# EAGLE board controlBoard (EAGLE 9.2.0)
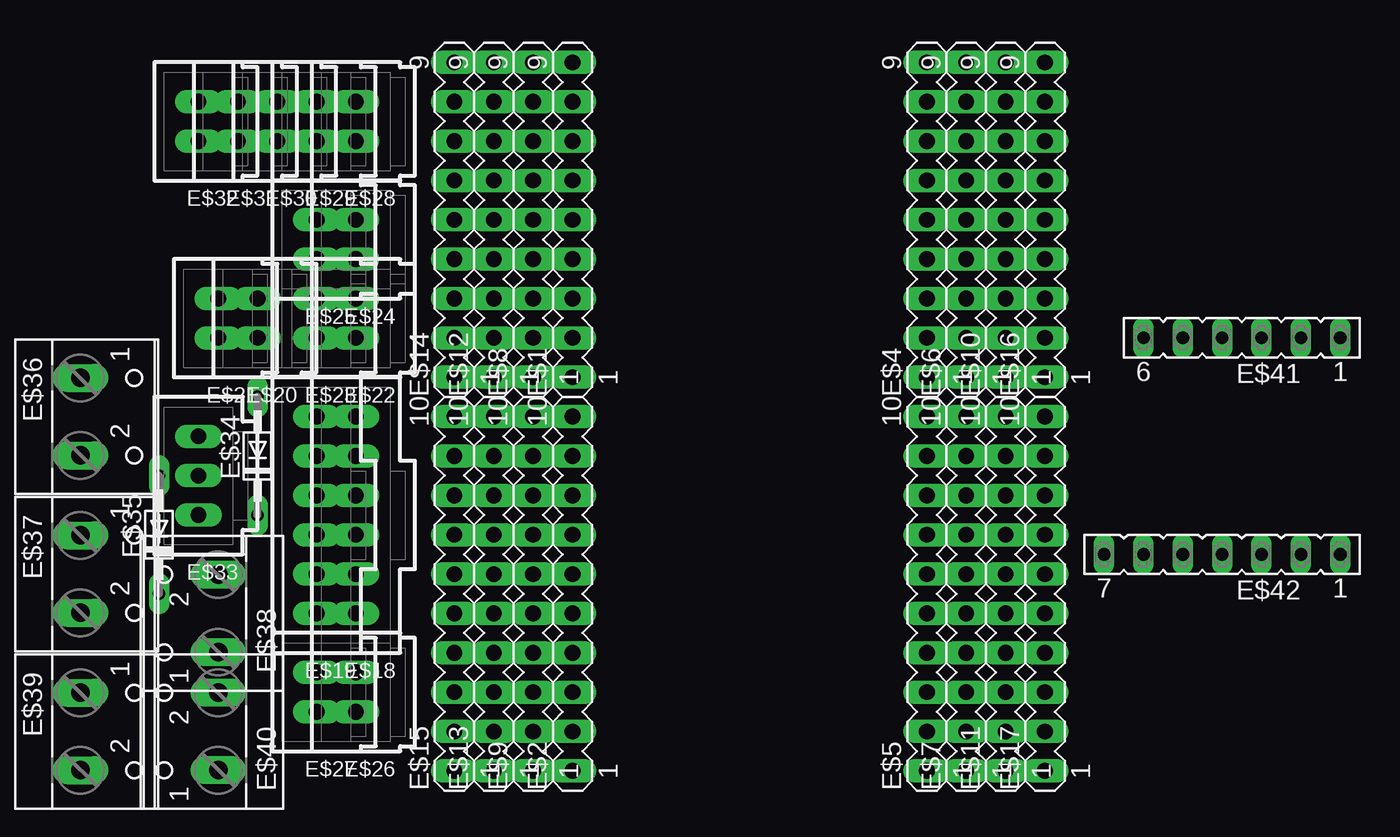
[diagram p0: board, top side]
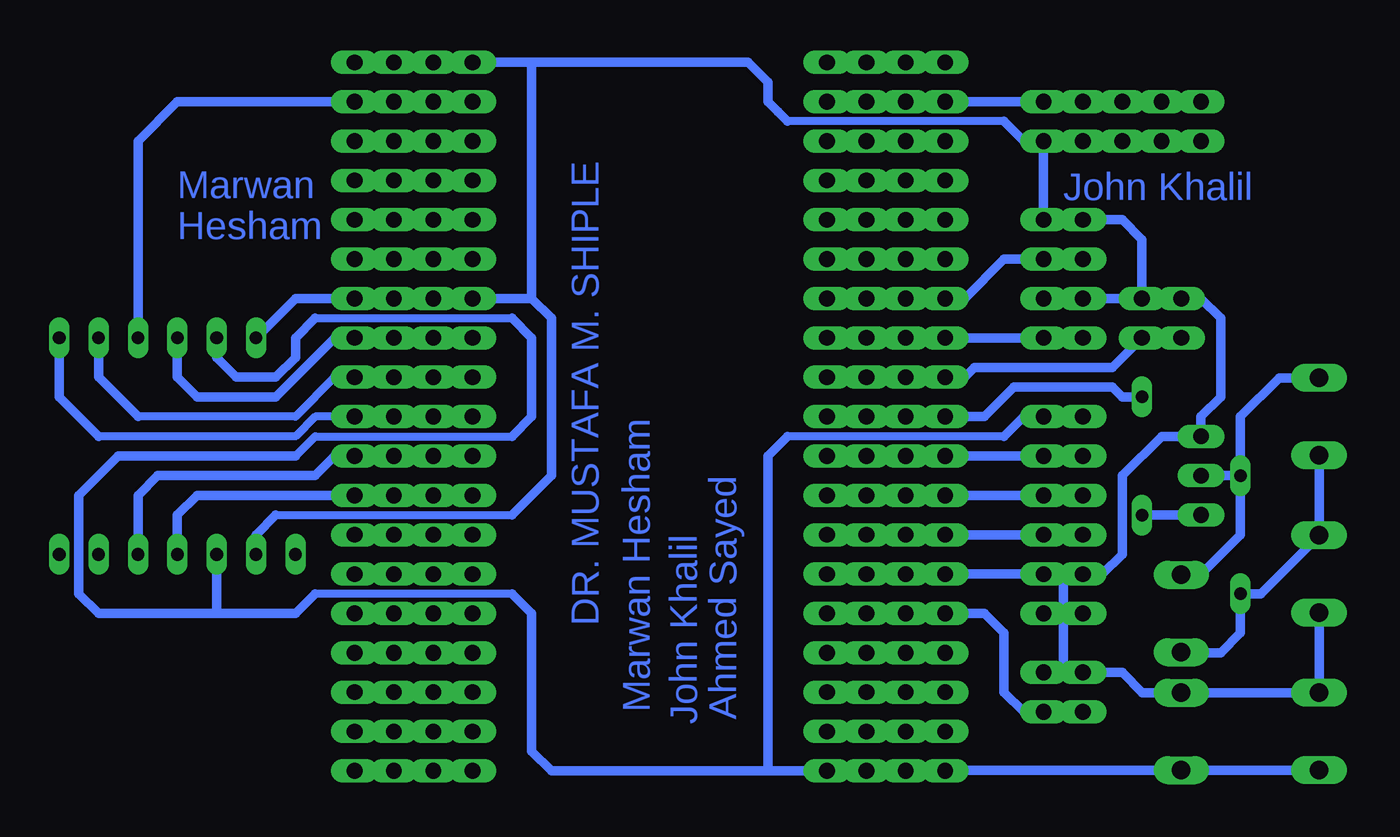
[diagram p1: board, bottom side, seen from below]

No outline drawn. Coordinates in mm, seen from the top.
Copper layers (1*16): Top 0.035mm / dielectric 1.5mm / Bottom 0.035mm
Design rules "default": minimum track width 6mil, minimum drill 0.35mm, track to track 6mil, track to pad 6mil, pad to pad 6mil, via to via 6mil, smd to smd 6mil, copper to edge 40mil, drill to drill 6mil, minimum pad ring 10mil, minimum via ring 8mil, stop-mask expansion 4mil, vias tented up to drill 0mil, thermal gap 10mil

## Footprints (pad centres in the part's own frame; a part is rotated, then mirrored left to right if it is on the bottom)
MA09-1 = drill 1.016 long: 1 -10.16,0; 2 -7.62,0; 3 -5.08,0; 4 -2.54,0; 5 0,0; 6 2.54,0; 7 5.08,0; 8 7.62,0; 9 10.16,0
MA10-1 = drill 1.016 long: 1 -11.43,0; 2 -8.89,0; 3 -6.35,0; 4 -3.81,0; 5 -1.27,0; 6 1.27,0; 7 3.81,0; 8 6.35,0; 9 8.89,0; 10 11.43,0
70543-06 = drill 1.016 long: 1 -6.35,0; 2 -3.81,0; 3 -1.27,0; 4 1.27,0; 5 3.81,0; 6 6.35,0
70543-02 = drill 1.016 long: 1 -1.27,0; 2 1.27,0
70543-03 = drill 1.016 long: 1 -2.54,0; 2 0,0; 3 2.54,0
DO34-7 = drill 0.813 long: A 3.81,0; C -3.81,0
W237-102 = drill 1.194 long: 1 -2.5,-1.27; 2 2.5,-1.27
FE06 = drill 0.813 long: 1 -6.35,0; 2 -3.81,0; 3 -1.27,0; 4 1.27,0; 5 3.81,0; 6 6.35,0
FE07 = drill 0.813 long: 1 -7.62,0; 2 -5.08,0; 3 -2.54,0; 4 0,0; 5 2.54,0; 6 5.08,0; 7 7.62,0

## Placement (x,y rotation side)
E$1  [MA09-1]  33.02,66.04 90 top
E$2  [MA10-1]  33.02,41.91 90 top
E$4  [MA09-1]  55.88,66.04 90 top
E$5  [MA10-1]  55.88,41.91 90 top
E$6  [MA09-1]  58.42,66.04 90 top
E$7  [MA10-1]  58.42,41.91 90 top
E$8  [MA09-1]  30.48,66.04 90 top
E$9  [MA10-1]  30.48,41.91 90 top
E$10  [MA09-1]  60.96,66.04 90 top
E$11  [MA10-1]  60.96,41.91 90 top
E$12  [MA09-1]  27.94,66.04 90 top
E$13  [MA10-1]  27.94,41.91 90 top
E$14  [MA09-1]  25.4,66.04 90 top
E$15  [MA10-1]  25.4,41.91 90 top
E$16  [MA09-1]  63.5,66.04 90 top
E$17  [MA10-1]  63.5,41.91 90 top
E$18  [70543-06]  19.05,46.99 90 top
E$19  [70543-06]  16.51,46.99 90 top
E$20  [70543-02]  12.7,59.69 90 top
E$21  [70543-02]  10.16,59.69 90 top
E$22  [70543-02]  19.05,59.69 90 top
E$23  [70543-02]  16.51,59.69 90 top
E$24  [70543-02]  19.05,64.77 90 top
E$25  [70543-02]  16.51,64.77 90 top
E$26  [70543-02]  19.05,35.56 90 top
E$27  [70543-02]  16.51,35.56 90 top
E$28  [70543-02]  19.05,72.39 90 top
E$29  [70543-02]  16.51,72.39 90 top
E$30  [70543-02]  13.97,72.39 90 top
E$31  [70543-02]  11.43,72.39 90 top
E$32  [70543-02]  8.89,72.39 90 top
E$33  [70543-03]  8.89,49.53 90 top
E$34  [DO34-7]  12.7,50.8 90 top
E$35  [DO34-7]  6.35,45.72 90 top
E$36  [W237-102]  2.54,53.34 270 top
E$37  [W237-102]  2.54,43.18 270 top
E$38  [W237-102]  8.89,40.64 90 top
E$39  [W237-102]  2.54,33.02 270 top
E$40  [W237-102]  8.89,33.02 90 top
E$41  [FE06]  76.2,58.42 180 top
E$42  [FE07]  74.93,44.45 180 top

## Library data of the parts
E$1 E$2 E$4-E$17 = con-lstb
E$18-E$33 = con-molex
E$34 E$35 = diode
E$36-E$40 = con-wago-500
E$41 E$42 = con-lsta

## Nets
S$1: E$2.6 E$4.3 E$4.9 E$6.3 E$9.6 E$10.3 E$13.6 E$15.6 E$16.3 E$18.1 E$18.2 E$19.1 E$19.2 E$20.2 E$21.2 E$22.2 E$23.2 E$24.2 E$25.2 E$26.2 E$27.2 E$28.1 E$29.1 E$30.1 E$31.1 E$32.1 E$33.3 E$37.2 E$39.1 E$40.2 E$41.6 E$42.6
S$2: E$2.7 E$9.7 E$13.7 E$15.7 E$18.3 E$19.3
S$3: E$2.8 E$9.8 E$13.8 E$15.8 E$18.4 E$19.4
S$4: E$2.9 E$9.9 E$13.9 E$15.9 E$18.5 E$19.5
S$5: E$1.1 E$8.1 E$12.1 E$14.1 E$20.1 E$21.1
S$6: E$1.2 E$8.2 E$12.2 E$14.2 E$22.1 E$23.1
S$7: E$1.3 E$8.3 E$12.3 E$14.3 E$24.1 E$25.1
S$8: E$2.5 E$9.5 E$13.5 E$15.5 E$26.1 E$27.1
S$9: E$1.8 E$8.8 E$12.8 E$14.8 E$28.2 E$29.2 E$30.2 E$31.2 E$32.2
S$10: E$2.10 E$9.10 E$13.10 E$15.10 E$34.A
S$11: E$33.1 E$34.C
S$12: E$2.1 E$9.1 E$13.1 E$15.1 E$18.6 E$19.6 E$39.2 E$40.1 E$41.5 E$42.5
S$13: E$33.2 E$35.A E$36.1 E$38.2
S$14: E$35.C E$36.2 E$37.1 E$38.1
S$15: E$5.10 E$7.10 E$11.10 E$17.10 E$41.1
S$16: E$4.1 E$6.1 E$10.1 E$16.1 E$41.2
S$17: E$4.8 E$6.8 E$10.8 E$16.8 E$41.3
S$18: E$4.2 E$6.2 E$10.2 E$16.2 E$41.4
S$19: E$5.9 E$7.9 E$11.9 E$17.9 E$42.3
S$20: E$5.8 E$7.8 E$11.8 E$17.8 E$42.4

## Tracks (layer width: path | path; a pad name or v marks a point on that pad's centre or on a via)
S$1
  Bottom 0.508: 21.59,72.39 35.56,72.39 | 68.58,46.99 53.34,46.99
  Bottom 0.61: E$18.1 17.78,40.64 | 17.78,40.64 E$19.1 | 17.78,43.18 E$18.2 E$15.6 E$13.6 E$9.6 E$2.6 | 17.78,43.18 E$19.2 15.24,43.18 13.97,44.45 13.97,49.53 11.43,52.07 E$33.3 8.89,53.34 7.62,54.61 7.62,59.69 8.89,60.96 E$21.2 E$20.2 | 17.78,40.64 17.78,43.18 | E$26.2 17.78,36.83 | 17.78,36.83 E$27.2 13.97,36.83 12.66,35.52 E$40.2 E$39.1 E$37.2 | 17.78,36.83 17.78,40.64 | E$22.2 E$23.2 E$20.2 | E$20.2 12.7,64.77 13.97,66.04 E$25.2 E$24.2 E$28.1 | E$32.1 E$31.1 E$30.1 E$29.1 E$28.1 | E$28.1 20.32,71.12 21.59,72.39 | 52.07,76.2 E$4.9 | 52.07,60.96 E$4.3 E$6.3 E$10.3 E$16.3 67.31,60.96 E$41.6 | 52.07,60.96 52.07,76.2 | E$42.6 69.85,45.72 68.58,46.99 | 53.34,46.99 50.8,49.53 50.8,59.69 52.07,60.96 | 52.07,76.2 39.37,76.2 38.1,76.2 36.83,74.93 36.83,73.66 36.2,73.03 | 36.2,73.03 35.56,72.39 | 36.2,73.03
S$2
  Bottom 0.61: E$19.3 E$18.3 E$15.7 E$13.7 E$9.7 E$2.7
S$3
  Bottom 0.61: E$19.4 E$18.4 E$15.8 E$13.8 E$9.8 E$2.8
S$4
  Bottom 0.61: E$2.9 E$9.9 E$13.9 E$15.9 E$18.5 E$19.5
S$5
  Bottom 0.61: E$1.1 E$8.1 E$12.1 E$14.1 24.13,55.88 23.5,56.52 14.61,56.52 E$20.1 E$21.1
S$6
  Bottom 0.61: E$23.1 E$22.1 E$14.2 E$12.2 E$8.2 E$1.2
S$7
  Bottom 0.61: E$1.3 E$8.3 E$12.3 E$14.3 24.13,60.96 21.59,63.5 E$24.1 E$25.1
S$8
  Bottom 0.61: E$27.1 E$26.1 20.32,34.29 21.59,35.56 21.59,39.37 22.86,40.64 E$15.5 E$13.5 E$9.5 E$2.5
S$9
  Bottom 0.61: E$32.2 E$31.2 E$30.2 E$29.2 E$28.2 | 20.32,73.66 E$28.2 | E$28.2 E$14.8 E$12.8 E$8.8 E$1.8
S$10
  Bottom 0.61: E$34.A 13.97,54.61 14.61,55.24 20.95,55.24 22.86,53.34 E$15.10 E$13.10 E$9.10 E$2.10
S$11
  Bottom 0.61: E$33.1 E$34.C
S$12
  Bottom 0.508: 21.59,52.07 35.56,52.07 | 66.04,59.69 53.34,59.69 | 53.34,41.91 66.04,41.91 | 67.31,50.8 66.04,52.07 53.34,52.07
  Bottom 0.61: 36.83,30.48 E$2.1 E$9.1 E$13.1 E$15.1 25.36,30.52 E$40.1 E$39.2 | 21.59,52.07 20.32,53.34 E$18.6 E$19.6 | E$41.5 72.39,57.15 71.12,55.88 68.58,55.88 67.31,57.15 67.31,58.42 66.04,59.69 | 36.83,30.48 36.83,50.8 35.56,52.07 | 67.31,50.8 78.74,50.8 81.28,48.26 81.28,41.91 80.01,40.64 72.39,40.64 | 53.34,52.07 52.07,53.34 52.07,58.42 53.34,59.69 | 36.83,30.48 50.8,30.48 52.07,31.75 52.07,40.64 53.34,41.91 | 66.04,41.91 67.31,40.64 72.39,40.64 | E$42.5 72.39,40.64
S$13
  Bottom 0.61: E$33.2 E$35.A | E$35.A 6.35,45.72 8.93,43.14 E$38.2 | E$36.1 3.85,55.84 6.35,53.34 E$35.A
S$14
  Bottom 0.61: E$38.1 10.12,38.1 7.62,38.1 6.35,39.37 E$35.C 5.04,41.91 E$37.1 E$36.2
S$15
  Bottom 0.508: 80.01,52.07 67.31,52.07 66.04,53.34 E$17.10
  Bottom 0.61: 80.01,52.07 82.55,54.61 E$41.1 | E$5.10 E$7.10 E$11.10 E$17.10
S$16
  Bottom 0.508: 77.47,53.34 67.31,53.34 64.77,55.88
  Bottom 0.61: 77.47,53.34 80.01,55.88 E$41.2 | 64.77,55.88 E$16.1 E$10.1 E$6.1 E$4.1
S$17
  Bottom 0.61: E$4.8 E$6.8 E$10.8 E$16.8 74.93,73.66 77.47,71.12 E$41.3
S$18
  Bottom 0.61: E$41.4 74.93,55.88 73.66,54.61 68.58,54.61 64.77,58.42 E$16.2 E$10.2 E$6.2 E$4.2
S$19
  Bottom 0.61: E$5.9 E$7.9 | 59.69,50.8 E$7.9 | E$7.9 E$11.9 E$17.9 64.77,50.8 66.04,49.53 76.2,49.53 77.47,48.26 E$42.3
S$20
  Bottom 0.61: E$42.4 74.93,46.99 73.66,48.26 E$17.8 E$11.8 E$7.8 E$5.8

## Text on the board
Bottom: DR. MUSTAFA M. SHIPLE | John Khalil | Marwan / Hesham | Ahmed Sayed | John Khalil | Marwan Hesham